# Altium PCB Capstone_Motor_Driver.PcbDoc
Units mil, origin at the board's own origin, x right, y up, seen from the top; angles counter-clockwise.
Board outline 1705 x 1630 mil, 2 copper layers (Top Layer, Bottom Layer); 16 components, 21 nets, 63 pads, 10 vias.
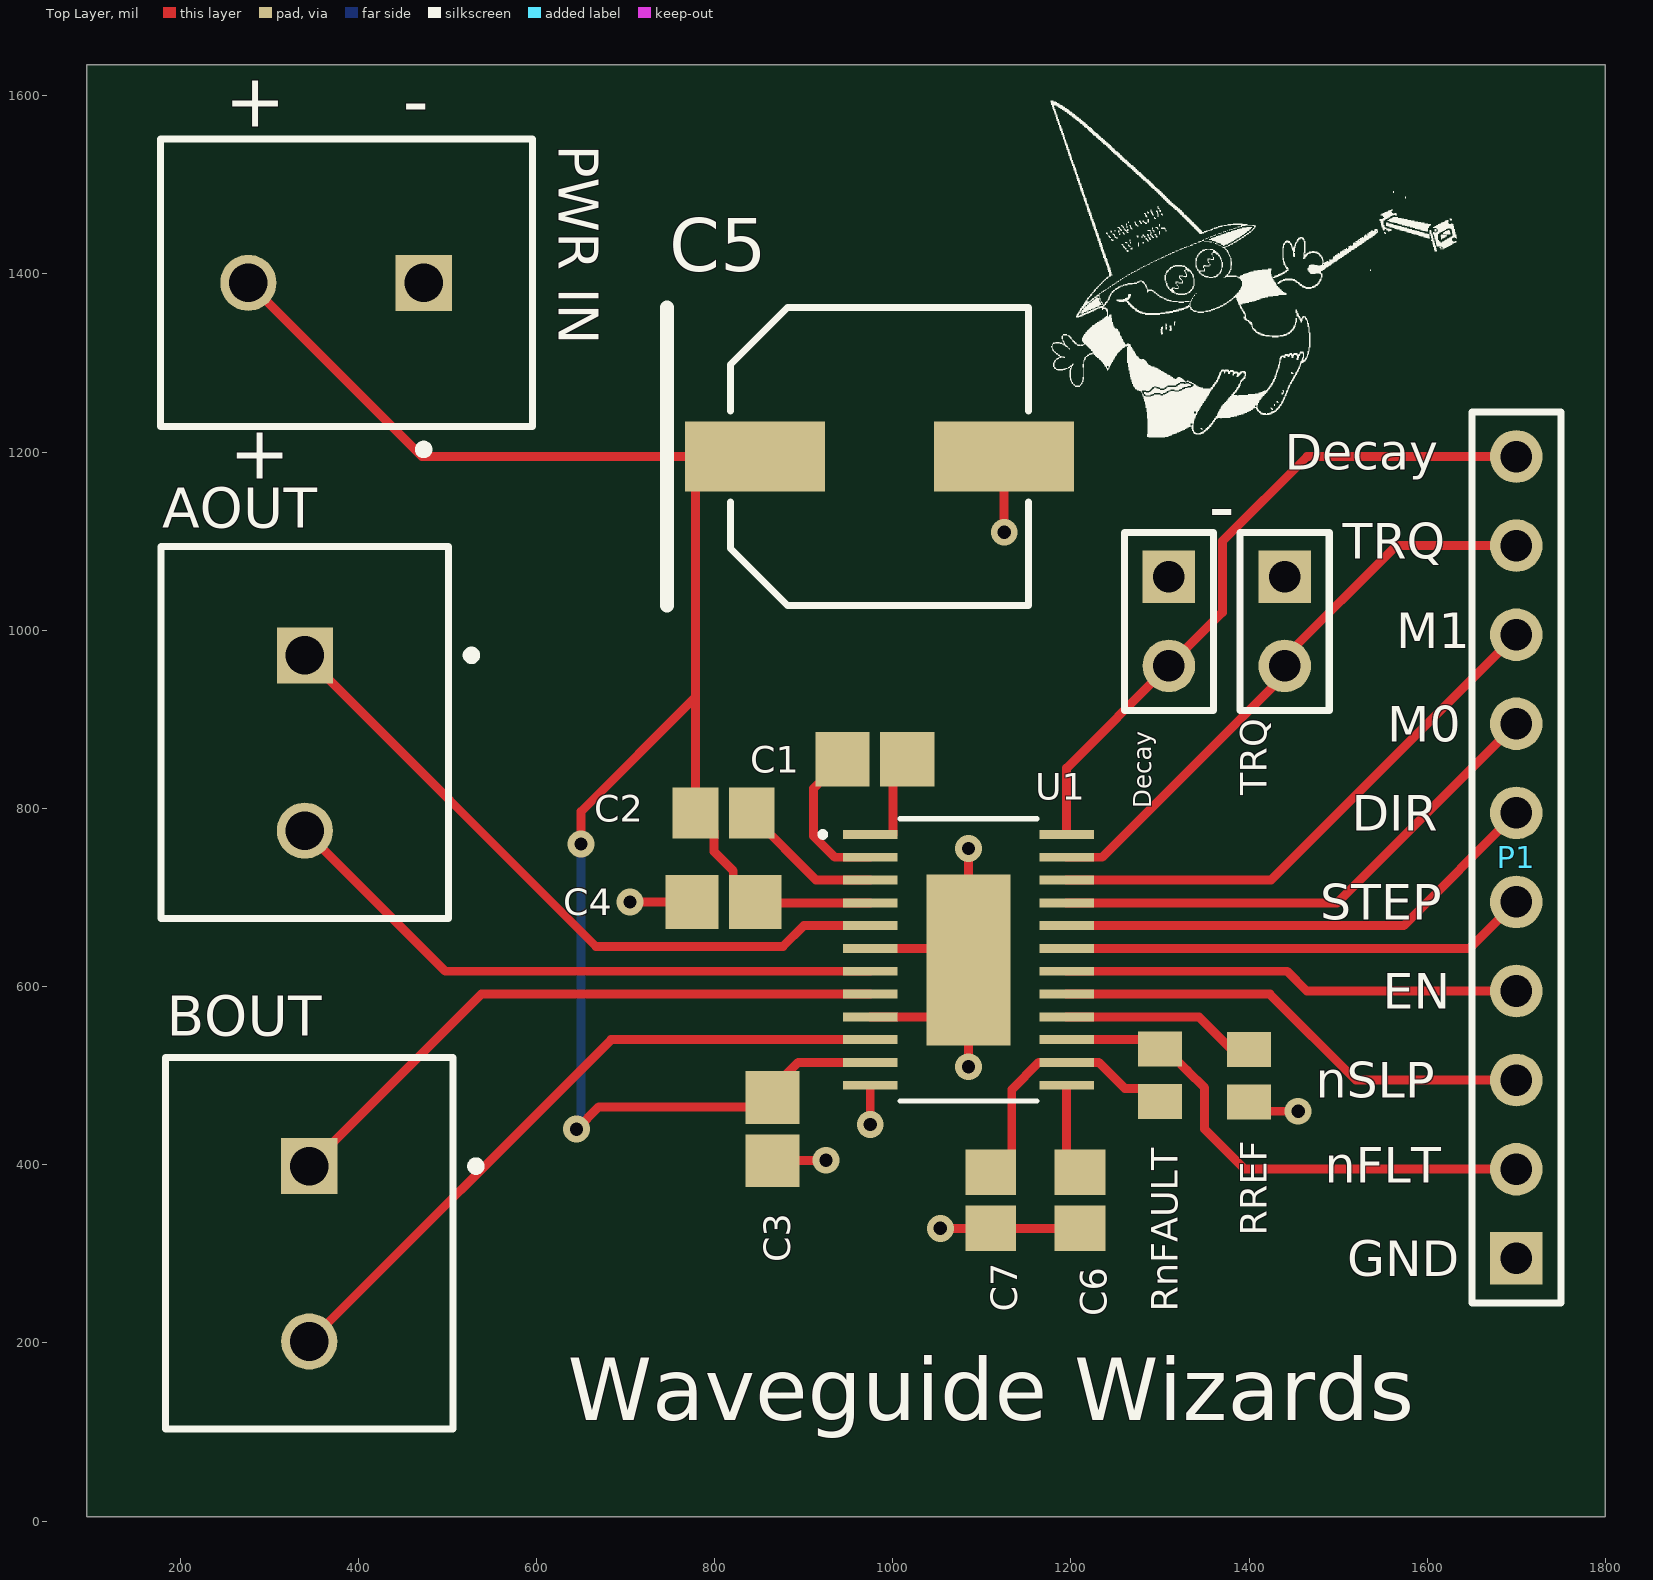
[diagram p0: Top Layer view]
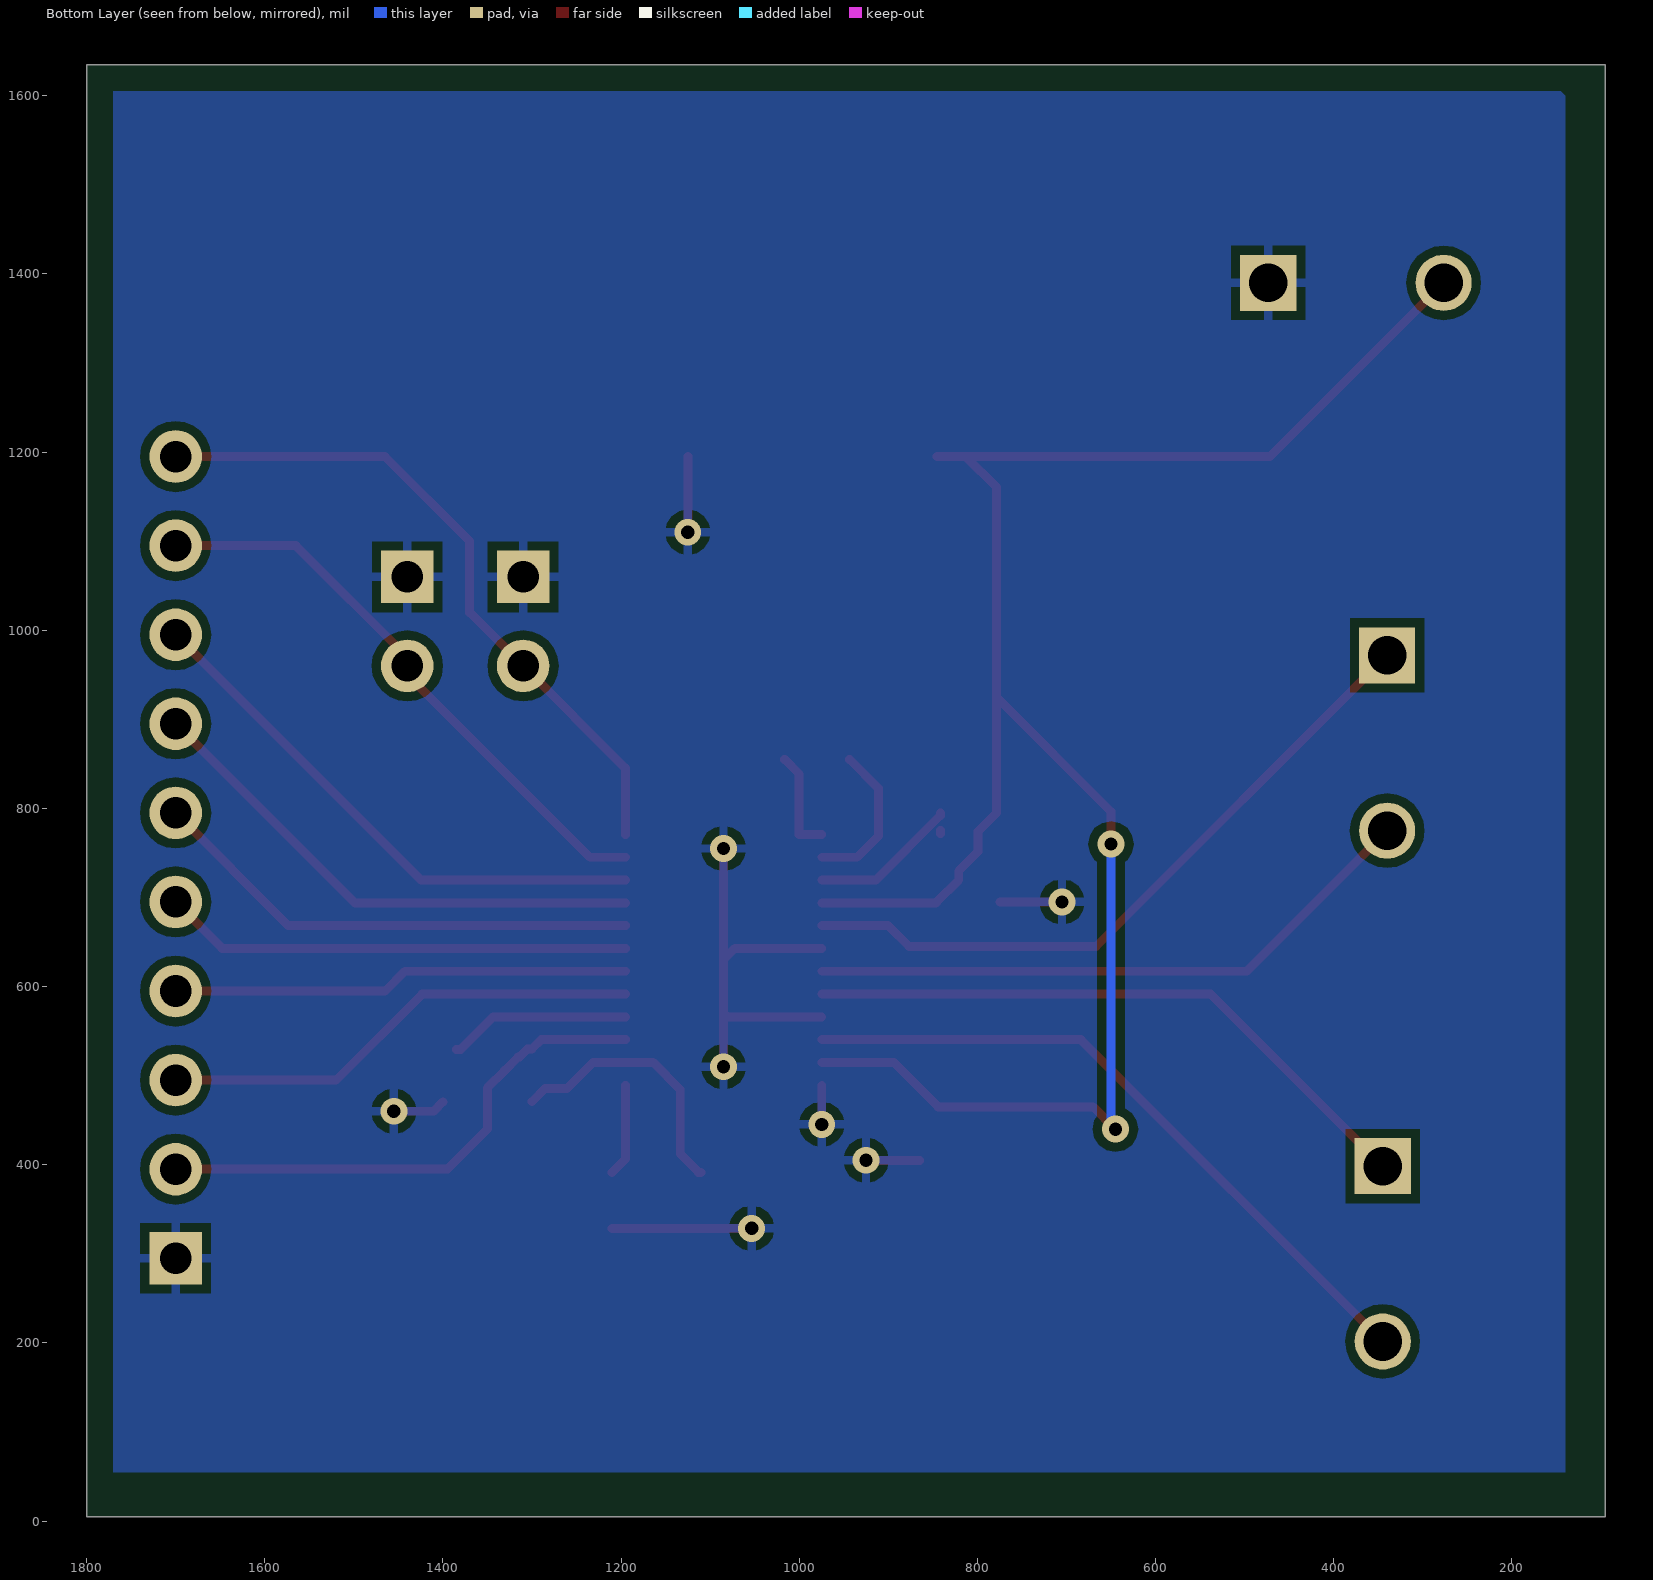
[diagram p1: Bottom Layer view, seen from below]

## Layer stack, top to bottom
Top Solder: solder mask 0.4, Solder Resist, Dk 3.5
Top Layer: signal copper 1.4
Dielectric 1: dielectric 12.6, FR-4, Dk 4.8
Bottom Layer: signal copper 1.4
Bottom Solder: solder mask 0.4, Solder Resist, Dk 3.5

## Board outline
95,5 95,1635 1800,1635 1800,5

## Design rules (kind name [scope] priority, off if disabled: settings)
Clearance [All] p1: gap=10 ignorepadtopadclearanceinfootprint=FALSE except(0: Arc-Hole Track-Hole SMDPad-Hole THPad-Hole Via-Hole Fill-Hole Poly-Hole Region-Hole Text-Hole)
PolygonConnect [All] p1: connectstyle=Relief reliefconductorwidth=10 reliefentries=4 polygonreliefangle="90 Angle" airgapwidth=10
RoutingVias [All] p1: holewidth=15 width=30 viastyle="Through Hole" minholewidth=15 minwidth=10 maxholewidth=28 maxwidth=50
SolderMaskExpansion [All] p1: expansion=4
Width [All] p1: maxlimit=30 minlimit=6 preferedwidth=10
30 further rules are at their usual default settings.

## Components (designator, comment, footprint, x,y, rotation, side; value= is the part's Value field where it differs from the comment)
AOUT "282836-2" TECO-282836-2_V 340,873.43 r270 top
BOUT "282836-2" TECO-282836-2_V 345,300 r270 top
C1 "0.022uF" CAPC2013X94X50ML20T25 980,855 r0 top
C2 "0.22uF" CAPC2013X145X50NL20T25 810,795 r0 top
C3 "0.01uF" CAPC2013X88X50ML20T25 865,440 r90 top
C4 "0.01uF" CAPC2013X88X50ML20T25 810,695 r0 top
C5 "100uF" PNSC-FK-V-F_V 985,1195 r0 top
C6 "0.47uF" CAPC2013X110X50NL20T25 1210,360 r90 top
C7 "0.47uF" CAPC2013X110X50NL20T25 1110,360 r90 top
Decay "Header 2" HDR1X2 1310,1060 r270 top
P1 "Header 10" HDR1X10 1700,295 r90 top
"PWR IN" "282836-2" TECO-282836-2_V 375,1390 r180 top
RnFAULT "10k" RESC2013X60X40LL20T25_A 1300,500.47 r90 top
RREF "30k" RESC2013X60X40LL20T25_A 1400,500 r90 top
TRQ "Header 2" HDR1X2 1440,1060 r270 top
U1 "DRV8886" PWP0024B_N 1085,630 r0 top

## Footprints (in the part's own frame and the unit in brackets; to place one, negate y for a bottom-side part, rotate by r counter-clockwise, add the part's x,y. Pads: shape width x height; smd on the part's side, far side on the other; paste and mask are expansions set on the pad)
CAPC2013X88X50ML20T25 [mm] "Chip Capacitor, 2-Leads, Body 2.00x1.25mm, IPC Low Density"
  rect 1.5x1.55 smd: 1(-0.9,0) 2(0.9,0)
  body extent -1.1,-0.72 1.1,0.72, height 0.88
CAPC2013X94X50ML20T25 [mm] "Chip Capacitor, 2-Leads, Body 2.01x1.25mm, IPC Low Density"
  rect 1.55x1.55 smd: 1(-0.925,0) 2(0.925,0)
  body extent -1.1,-0.72 1.11,0.72, height 0.94
CAPC2013X110X50NL20T25 [mm] "Chip Capacitor, 2-Leads, Body 2.00x1.25mm, IPC Medium Density"
  rect 1.3x1.45 smd: 1(-0.8,0) 2(0.8,0)
  body extent -1.1,-0.72 1.1,0.72, height 1.1
CAPC2013X145X50NL20T25 [mm] "Chip Capacitor, 2-Leads, Body 2.00x1.25mm, IPC Medium Density"
  rect 1.3x1.45 smd: 1(-0.8,0) 2(0.8,0)
  body extent -1.1,-0.72 1.1,0.72, height 1.45
HDR1X2 [mm] "Connector; Header; 2 Position"
  rect 1.5x1.5 hole 0.9: 1(0,0)
  round 1.5 hole 0.9: 2(2.54,0)
  silkscreen extent -1.27,-1.27 3.81,1.27
HDR1X10 [mm] "Connector; Header; 10 Position"
  rect 1.5x1.5 hole 0.9: 1(0,0)
  round 1.5 hole 0.9: 2(2.54,0) 3(5.08,0) 4(7.62,0) 5(10.16,0) 6(12.7,0) 7(15.24,0) 8(17.78,0) 9(20.32,0) 10(22.86,0)
  silkscreen extent -1.27,-1.27 24.13,1.27
PNSC-FK-V-F_V [mm] "CAPAE, 2-Leads, Body 8.50x8.50mm"
  rect 4x2 smd: 1(-3.55,0) 2(3.55,0)
  silkscreen extent -6.05,-4.25 4.25,4.25, body extent -5,-4.25 5,4.25, height 10.5
PWP0024B_N [mil]
  rect 61x10 smd paste+0 mask+2: 1(-110.24,140.75) 2(-110.24,115.16) 3(-110.24,89.57) 4(-110.24,63.98) 5(-110.24,38.39) 6(-110.24,12.8) 7(-110.24,-12.8) 8(-110.24,-38.39) 9(-110.24,-63.98) 10(-110.24,-89.57) 11(-110.24,-115.16) 12(-110.24,-140.75) 13(110.24,-140.75) 14(110.24,-115.16) 15(110.24,-89.57) 16(110.24,-63.98) 17(110.24,-38.39) 18(110.24,-12.8) 19(110.24,12.8) 20(110.24,38.39) 21(110.24,63.98) 22(110.24,89.57) 23(110.24,115.16) 24(110.24,140.75)
  rect 94x192 smd paste-95.5 mask+3: 25(0,0)
  silkscreen extent -167,-158 77,158, body extent 0,0 10,10, height 10
RESC2013X60X40LL20T25_A [mm] "Chip Resistor, 2-Leads, Body 2.20x1.35mm, IPC High Density"
  rect 1x1.25 smd: 1(-0.75,0) 2(0.75,0)
  body extent -1.1,-0.67 1.1,0.67, height 0.6
TECO-282836-2_V [mm] "Female Header, Pitch 5mm, 1 x 2 Position, Height 10mm"
  rect 1.6x1.6 hole 1.1: 1(-2.5,0)
  round 1.6 hole 1.1: 2(2.5,0)
  silkscreen extent -5.6,-4.1 5,4.88, body extent -5.6,-4.1 5,4.1, height 10

## Part data
AOUT BOUT "PWR IN": library part CMP-1684-00017-1, "Female Header, Pitch 5 mm, 1 x 2 Position, Height 10 mm, Tail Length 3.5 mm, Rohs, Bulk", Color=Green, Current=13.5A, Manufacturer="TE Connectivity", Package Description="Female Header, Pitch 5 mm, 1 x 2 Position, Height 10 mm, Tail Length 3.5 mm", Package Reference=THD, Standard Package=300, Voltage=300V, 3D Model=282836-2.pdf, Category=Connectors,Interconnects, Clamp Material - Plating=Brass-NickelPlated, Contact Material - Plating=Brass-TinPlated, Datasheet URL=http://www.te.com.cn/commerce/DocumentDelivery/DDEController?Action=showdoc&DocId=Catalog+Section%7F1308389_EUROSTYLE_TERMINAL_BLOCKS%7F0607%7Fpdf%7FEnglish%7FENG_CS_1308389_EUROSTYLE_TERMINAL_BLOCKS_0607.pdf%7F282836-2, Dynamic Catalog=BuchananSeries, Family=TerminalBlocks-WiretoBoard, Featured Product=EurostyleTerminalBlockConnectors, Features=Interlocking(Side), Housing Material=Polyamide(PA66),Nylon6/6, Manufacturer URL=http://www.te.com, Mating Orientation=HorizontalwithBoard, Mounting Type=ThroughHole, Number of Levels=1, Other Names="5ULV-02B / A98076", Packaging=Bulk, Pitch="0.197\"(5.00mm)", Positions Per Level=2, Product Training Modules=Wire-to-BoardEurostyleTerminalBlocks, RoHS Information=282836-2StatementofCompliance, Screw Material - Plating=Brass-NickelPlated, Screw Thread=M3, Series=Buchanan, Torque - Screw=0.68Nm(6Lb-In), Wire Gauge=16-30AWG, Wire Termination=Screw-RisingCageClamp
C1: library part CMP-2007-04396-1, Manufacturer="AVX Interconnect / Elco", Part Number=08055C223JAT2A
C2: library part CMP-2007-01163-1, "0805", Manufacturer=Kemet, Part Number=C0805C224K5RAC7800
C3 C4: library part CMP-2007-00254-1, "0805", Manufacturer=Kemet, Part Number=C0805C103J5RACTU
C5: library part CMP-2000-06208-1, "Aluminum Electrolytic Capacitor, 100 uF, +/- 20%, 50 V, 2-Pin SMD (Size Code F), -55 to 105 degC, RoHS, Tape and Reel", Capacitance=100µF, Case Size/Dimension=Ø8x10.2mm, Lifetime@Temperature=2000Hrs@105°C, Manufacturer=Panasonic, Operating Temp-Max=105°C, Operating Temp Range=-55to+105°C, Package Description="2-Pin Electrolytic Aluminum Capacitor, Body 8.3 x 8.3 mm", Package Reference=FK-V-F, Rated Voltage=50V, Ripple Current=350mA, Datasheet URL=http://industrial.panasonic.com/cdbs/www-data/pdf/RDE0000/ABA0000C1181.pdf, Datasheet Version=03/2016, Impedance=0.34O, Manufacturer URL=http://www.panasonic.com/, Mounting Technology=SurfaceMount, Package URL=http://industrial.panasonic.com/cdbs/www-data/pdf/RDE0000/DME0000COL48.pdf, Series=FK, Type=Can
C6 C7: library part CMP-2007-03659-1, "0805", Manufacturer=Kemet, Part Number=C0805C474K5RACTU
Decay TRQ: "Header, 2-Pin", LatestRevisionDate=17-Jul-2002, LatestRevisionNote="Re-released for DXP Platform.", Publisher="Altium Limited"
P1: "Header, 10-Pin", LatestRevisionDate=17-Jul-2002, LatestRevisionNote="Re-released for DXP Platform.", Publisher="Altium Limited"
RnFAULT RREF: library part CMP-2000-06228-1, "Metal Film Chip Resistor, High Reliability Type, 0.125 W, +/- 0.1%, -55 to 155 degC, 0805 (2012 Metric), RoHS, Tape and Reel", Case Code - in=0805, Case Code - mm=2012, Manufacturer=Panasonic, Operating Temperature Range=-55Cto+155C, Package / Case=0805(2012metric), Package Description="2-Pin Surface Mount Device, Body 2 x 1.25 mm", Power Rating=125mW(1/8W), Resistance=10kOhms, Temperature Coefficient=25PPM/C, Tolerance=0.1%, Voltage Rating=100V, Brand=Panasonic, Datasheet URL=https://industrial.panasonic.com/cdbs/www-data/pdf/RDM0000/AOA0000C307.pdf, Datasheet Version=02/2016, Factory Pack Quantity=5000, Height=0.5mm, Length=2mm, Manufacturer URL=http://www.panasonic.com/, Mounting Technology=SurfaceMount, Package Reference=0805, Packaging=Reel, Product=ThinFilmResistorsSMD, Product Category=ThinFilmResistors-SMD, RoHS=Details, Series=ERA-6A, Termination Style=SMD/SMT, Type=MetalFilmChipResistors, Width=1.25mm

## Via types
v1: diameter 30, hole 15, Top Layer to Bottom Layer, 10 vias

## Nets (pads, with @x,y where several pads share a name; then routed paths per layer and width w, separated by ;. In a path a pad name is that pad's centre, name@x,y a point inside that pad or via, vN(x,y) a via of type N, cw(c..) or ccw(c..) an arc to the next point about the centre after c; other vN are vias at no path point)
\FAULT: P1.2 RnFAULT.2 U1.15 | length 592.2
  Top Layer w10: U1.15 1289.57,540.43 RnFAULT.2 1304.92,530 1314.2,520.72 1315.72,520.72 1330.82,505.63 1350,486.45 1350,439.97 1394.97,395 P1.2
\SLEEP: P1.3 U1.17 | length 544.8
  Top Layer w10: U1.17 1423.39,591.61 1520,495 P1.3
AOUT1: AOUT.1 U1.5 | length 779.8
  Top Layer w10: AOUT.1 666.85,645 876.69,645 900.07,668.39 U1.5
AOUT2: AOUT.2 U1.7 | length 700.1
  Top Layer w10: AOUT.2 497.8,617.2 U1.7
BOUT1: BOUT.2 U1.10 | length 770.1
  Top Layer w10: BOUT.2 683.86,540.43 U1.10
BOUT2: BOUT.1 U1.8 | length 709.8
  Top Layer w10: BOUT.1 538.19,591.61 U1.8
CPH: C1.1 U1.2 | length 173.1
  Top Layer w10: C1.1 911.08,822.5 911.08,768.92 934.84,745.16 U1.2
Decay: Decay.2 P1.10 U1.24 | length 771
  Top Layer w10: U1.24 1195.24,845.24 Decay.2 1370,1020 1370,1100 1465,1195 P1.10
DIR: P1.6 U1.20 | length 557.2
  Top Layer w10: U1.20 1573.39,668.39 P1.6
ENABLE: P1.4 U1.18 | length 514
  Top Layer w10: U1.18 1442.63,617.2 1464.83,595 P1.4
GND: "PWR IN.1" C3.1 C4.1 C5.2 C6.1 C7.1 Decay.1 P1.1 RREF.1 TRQ.1 U1.6 U1.9 U1.12 U1.25 | length 947.1
  Top Layer w10: v1(705,695) C4.1 ; C3.1 924.57,404.57 v1(925,405) ; v1(974.76,445.24) U1.12 ; U1.9 1081.02,566.02 U1.25@1085,570 ; U1.6 1072.2,642.8 U1.25 ; v1(1053.5,328.5) C7.1 C6.1 ; v1(1085,510) U1.25@1085,570 ; v1(1085,755) U1.25 ; C5.2 1124.76,1110.24 v1(1125,1110) ; RREF.1 1410.47,460 v1(1455,460) ; U1.25@1085,570 U1.25
M0: P1.7 U1.21 | length 588
  Top Layer w10: U1.21 1498.98,693.98 P1.7
M1: P1.8 U1.22 | length 618.9
  Top Layer w10: U1.22 1424.57,719.57 P1.8
NetC1_2: C1.2 U1.1 | length 116.4
  Top Layer w10: U1.1 1000.26,770.75 1000.26,838.85 C1.2
NetC6_2: C6.2 U1.13 | length 103.9
  Top Layer w10: U1.13 1195.24,406.26 C6.2
NetC7_2: C7.2 RnFAULT.1 U1.14 | length 301.6
  Top Layer w10: C7.2 1112.95,391.5 1133.54,412.09 1133.54,484.27 1164.11,514.84 U1.14 1231.18,514.84 1260.39,485.63 1285.31,485.63 RnFAULT.1
NetRREF_2: RREF.2 U1.16 | length 204.9
  Top Layer w10: U1.16 1343.58,566.02 1380.08,529.53 RREF.2@1385,529.53
STEP: P1.5 U1.19 | length 526.4
  Top Layer w10: U1.19 1647.8,642.8 P1.5
TRQ: P1.9 TRQ.2 U1.23 | length 661.4
  Top Layer w10: U1.23 1235.16,745.16 1430,940 1430,950 TRQ.2 1440,970 1565,1095 P1.9
VCP: C2.2 U1.3 | length 169.2
  Top Layer w10: C2.2@841.5,772.05 C2.2@841.5,775 ; C2.2 841.5,792.05 913.98,719.57 U1.3
VM: "PWR IN.2" C2.1 C3.2 C4.2 C5.1 U1.4 U1.11 | length 2222.2
  Top Layer w10: 276.57,1390 471.57,1195 C5.1@812.87,1195 ; v1(645,440) 670,465 844.18,465 894.02,514.84 U1.11 ; v1(650,760) 650,796.5 778.5,925 ; C5.1 C5.1@812.87,1195 ; U1.4 846.46,693.98 C4.2 820.91,719.53 820.91,729.91 799.09,751.72 799.09,774.41 C2.1 778.5,925 ; 778.5,925 778.5,1160.63 C5.1@812.87,1195
  Bottom Layer w10: v1(645,440) 650,445 v1(650,760)

## Polygon pours and split planes (outlines as drawn)
GND on Bottom Layer "Bottom Layer-GND" (solid, pour order 1): 140,55 1770,55 1770,1605 145,1605 140,1600

## Silkscreen, mask and mechanical layers (free items; w line width, h text height)
Top Overlay:
  drawing of 114 lines, arcs and shapes, not listed
  text "+" at 250,1565 h60
  text "-" at 450,1565 h60
  text "Decay" at 1440,1180 h40
  text "+" at 255,1170 h60
  text "-" at 1355,1110 h60
  text "TRQ" at 1505,1080 h40
  text "M1" at 1565,980 h40
  text "M0" at 1555,875 h40
  text "DIR" at 1515,775 h40
  text "STEP" at 1480,675 h40
  text "EN" at 1550,575 h40
  text "nSLP" at 1475,475 h40
  text "nFLT" at 1485,380 h40
  text "GND" at 1510,275 h40
  text "Waveguide Wizards" at 635,90 h120
Mechanical 1:
  the board outline again, w24